# EAGLE board neojoint2-180 (EAGLE 6.6.0)
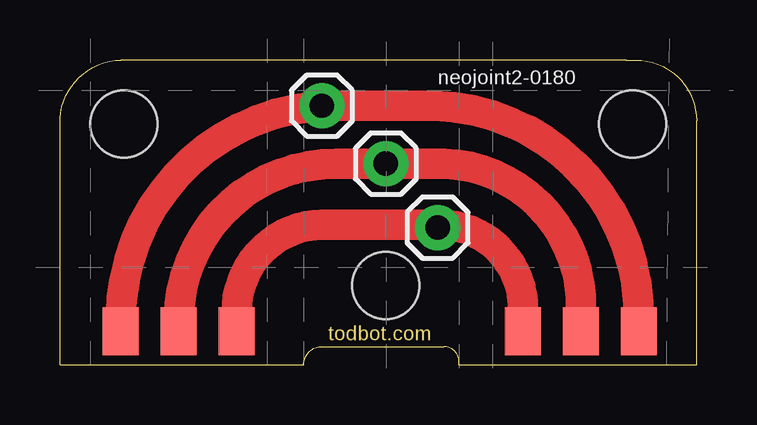
[diagram p0: board, top side]

Size 26.54 x 12.7 mm. Coordinates in mm from the lower left corner, seen from the top.
Outline: 0,0 10.16,0 arc-90 10.92,0.76 16,0.76 arc-90 16.64,0.13 16.64,0 16.76,0 26.54,0 26.54,10.16 arc90 24,12.7 23.62,12.7 2.54,12.7 arc90 0,10.03 0,0
Copper layers (1*16): Top 0.0356mm / dielectric 1.5011mm / Bottom 0.0356mm
Design rules "LaenPCBOrder-tod": minimum track width 10mil, minimum drill 13mil, track to track 6mil, track to pad 8mil, pad to pad 8mil, via to via 8mil, smd to smd 6mil, copper to edge 15mil, drill to drill 8mil, minimum pad ring 7mil, minimum via ring 7mil, stop-mask expansion 4mil, vias tented up to drill 25mil, thermal gap 10mil
Holes 2.8 mm at 2.67,10.03 23.88,10.03 13.59,3.3

## Footprints (pad centres in the part's own frame; a part is rotated, then mirrored left to right if it is on the bottom)
PAD-1.5X4.5 = smd 1.5 x 2: P$1 0,0
1X01 = drill 1.016 pad 1.88: 1 0,0

## Placement (x,y rotation side)
J1  [PAD-1.5X4.5]  7.37,1.4 0 top
J2  [PAD-1.5X4.5]  4.95,1.4 0 top
J3  [PAD-1.5X4.5]  24.13,1.4 180 top
J4  [PAD-1.5X4.5]  19.3,1.4 180 top
J5  [PAD-1.5X4.5]  21.72,1.4 180 top
J6  [PAD-1.5X4.5]  2.54,1.4 0 top
JP1  [1X01]  10.92,10.79 0 top
JP2  [1X01]  13.59,8.38 0 top
JP3  [1X01]  15.75,5.71 0 top

## Library data of the parts
J1-J6 JP1-JP3 = SparkFun-Connectors

## Nets
A: J1.P$1 J4.P$1 JP3.1
B: J2.P$1 J5.P$1 JP2.1
C: J3.P$1 J6.P$1 JP1.1

## Tracks (layer width: path | path; a pad name or v marks a point on that pad's centre or on a via)
A
  Top 0.61: 15.88,5.84 15.75,5.84 JP3.1
  Top 1.27: J4.P$1 19.3,2.29 arc90 15.88,5.84 10.92,5.84 arc90 7.37,2.16 J1.P$1
B
  Top 0.61: 11.56,8.38 JP2.1
  Top 1.27: J2.P$1 4.95,1.91 arc-90 11.56,8.38 JP2.1 16,8.38 arc-90 21.72,2.29 J5.P$1
C
  Top 0.61: JP1.1 11.43,10.79
  Top 1.27: 2.41,1.52 J6.P$1 2.54,1.91 arc-90 11.43,10.79 15.62,10.79 arc-90 24.13,1.78 J3.P$1

## Text on the board
Dimension: todbot.com
tPlace: neojoint2-0180